# Altium PCB onboardingPCB_nathanlin.PcbDoc
Units mm, origin at the board's own origin, x right, y up, seen from the top; angles counter-clockwise.
Board outline 59.5 x 49.28 mm, 4 copper layers (Top Layer, Int1 (GND), Int2 (PWR), Bottom Layer), stack 1.369 mm thick; 24 components, 22 nets, 97 pads, 27 vias.
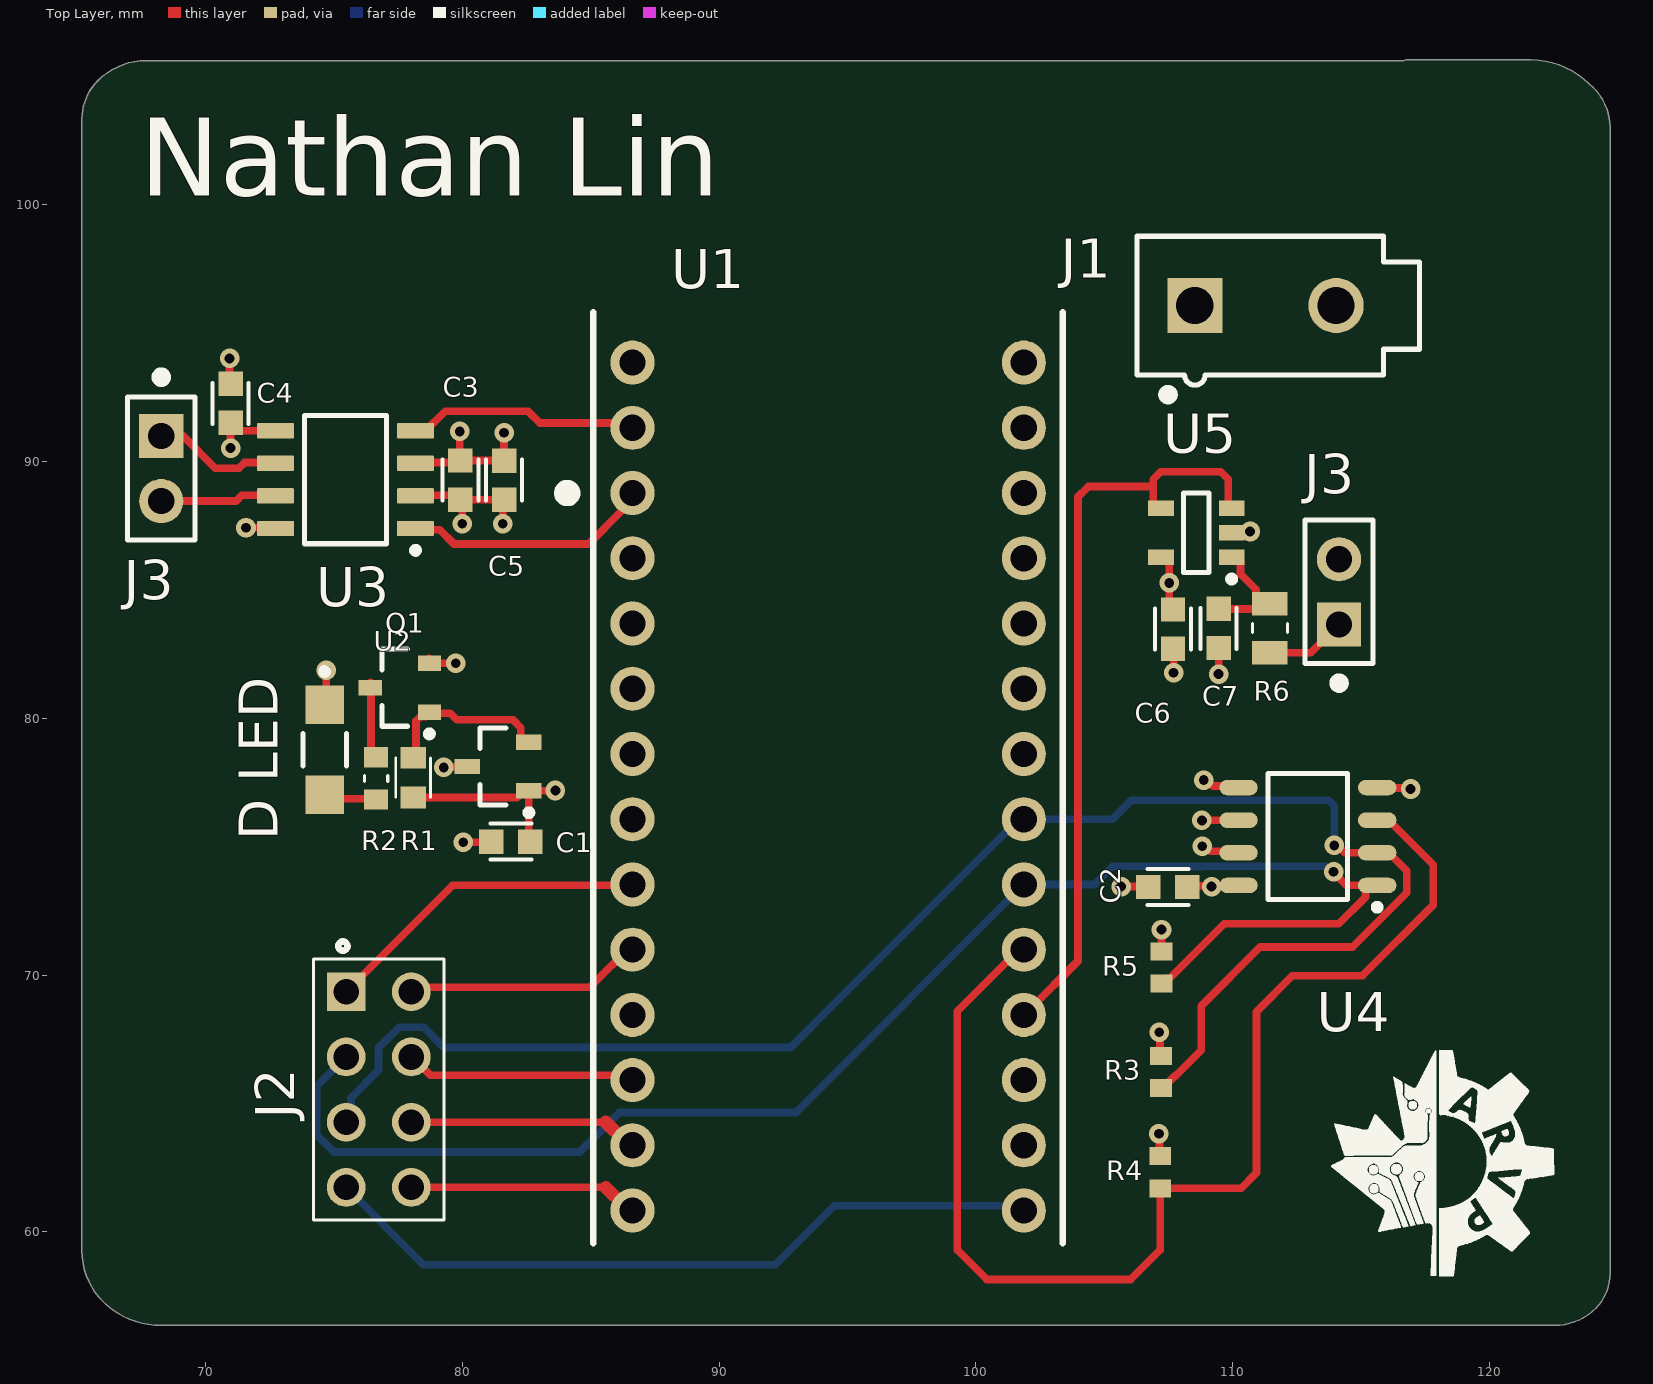
[diagram p0: Top Layer view]
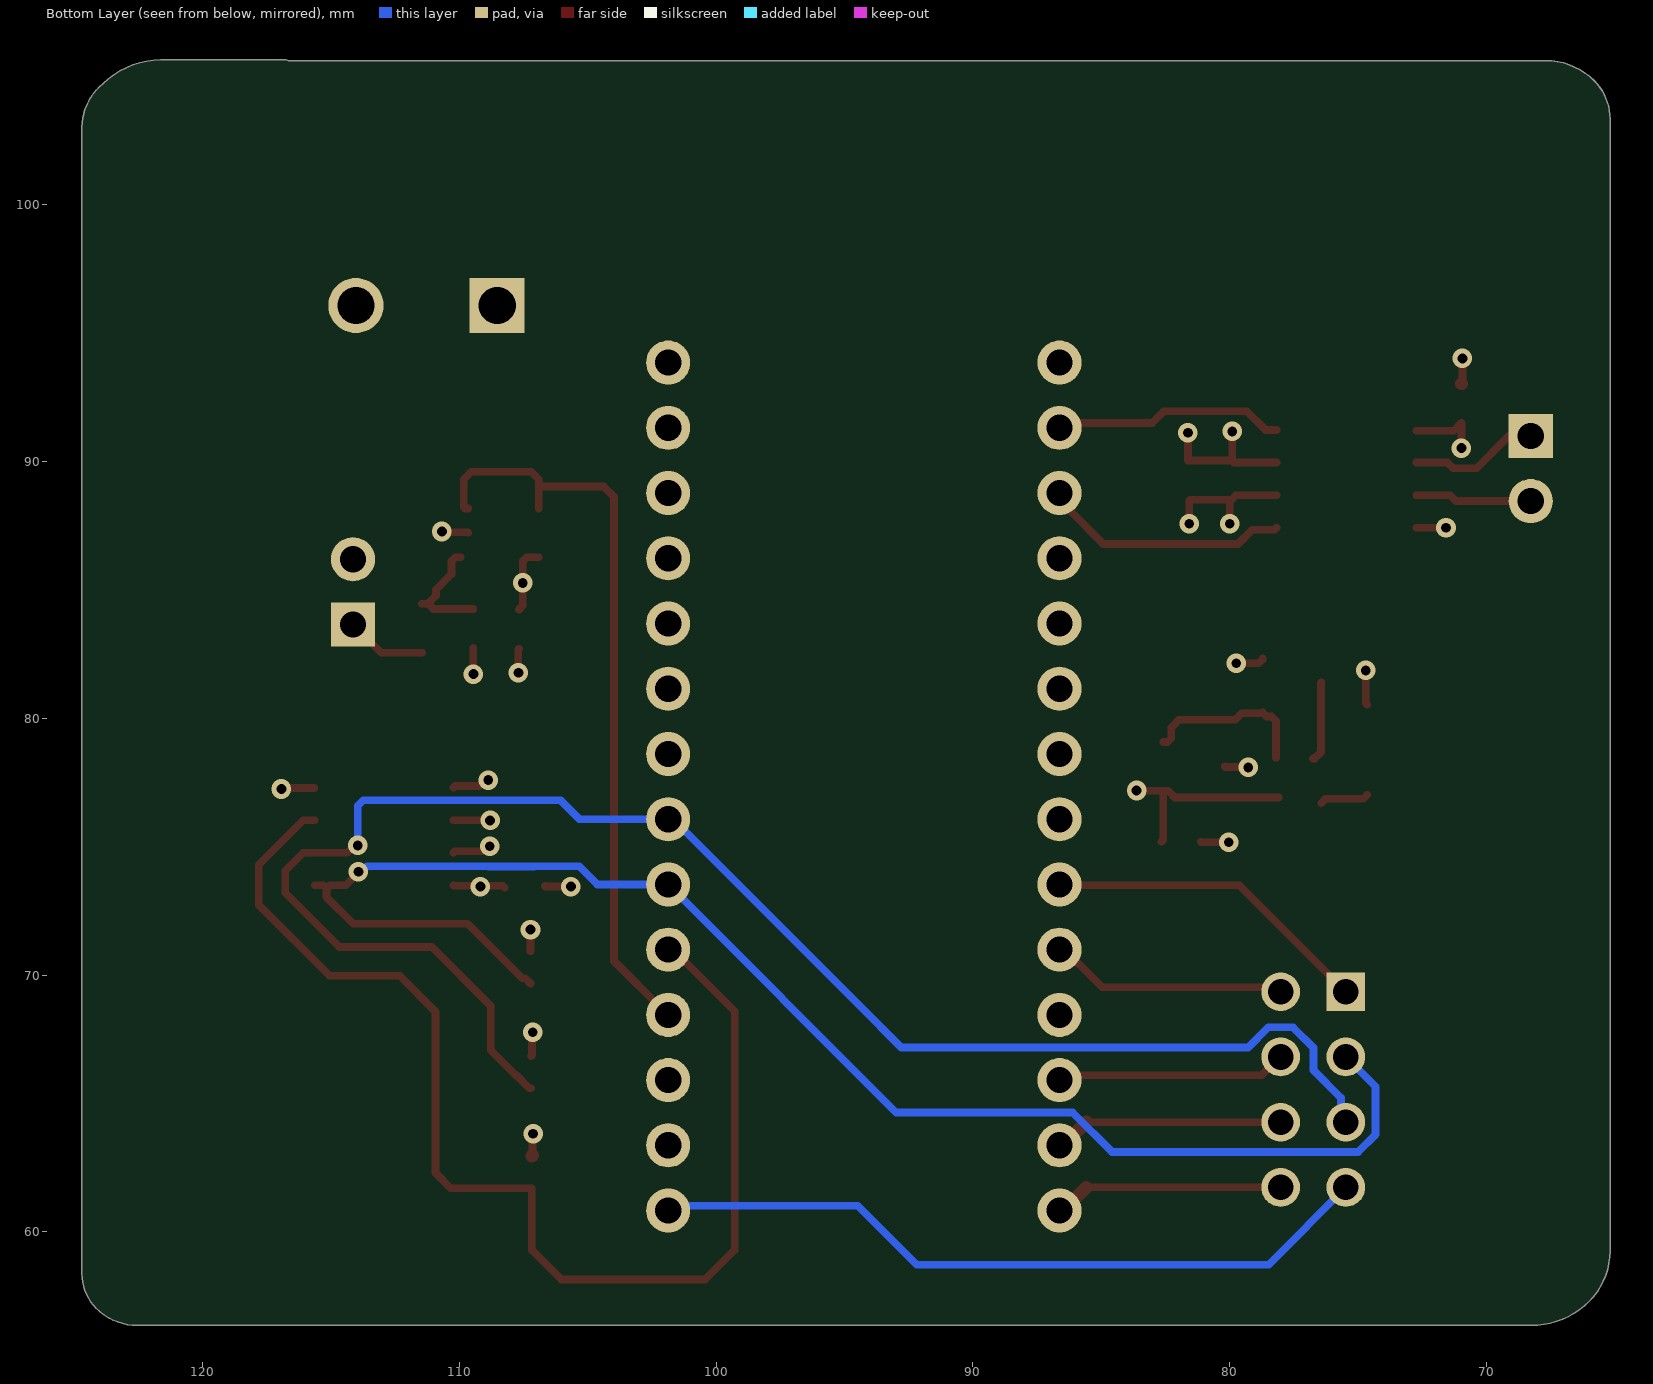
[diagram p1: Bottom Layer view, seen from below]
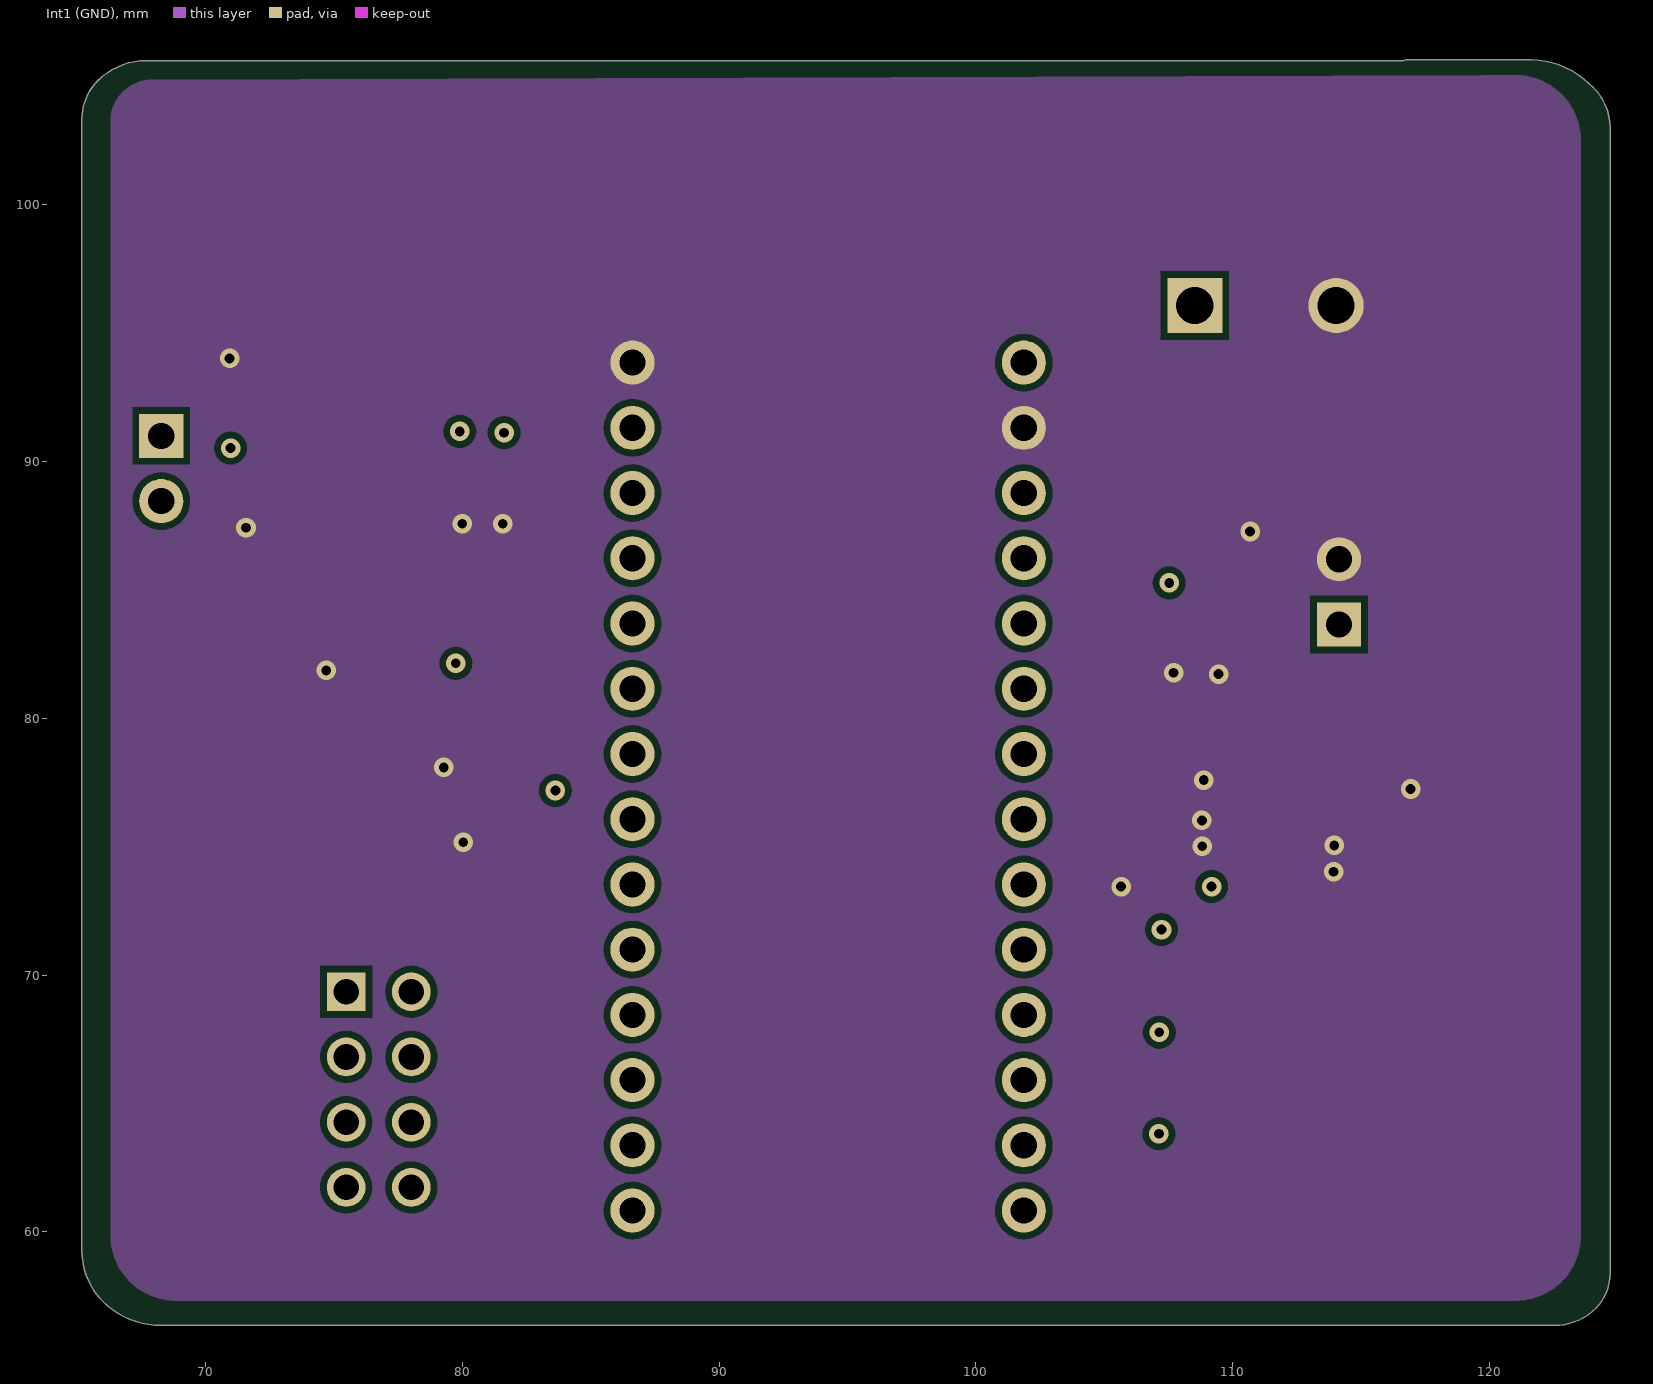
[diagram p2: Int1 (GND)]
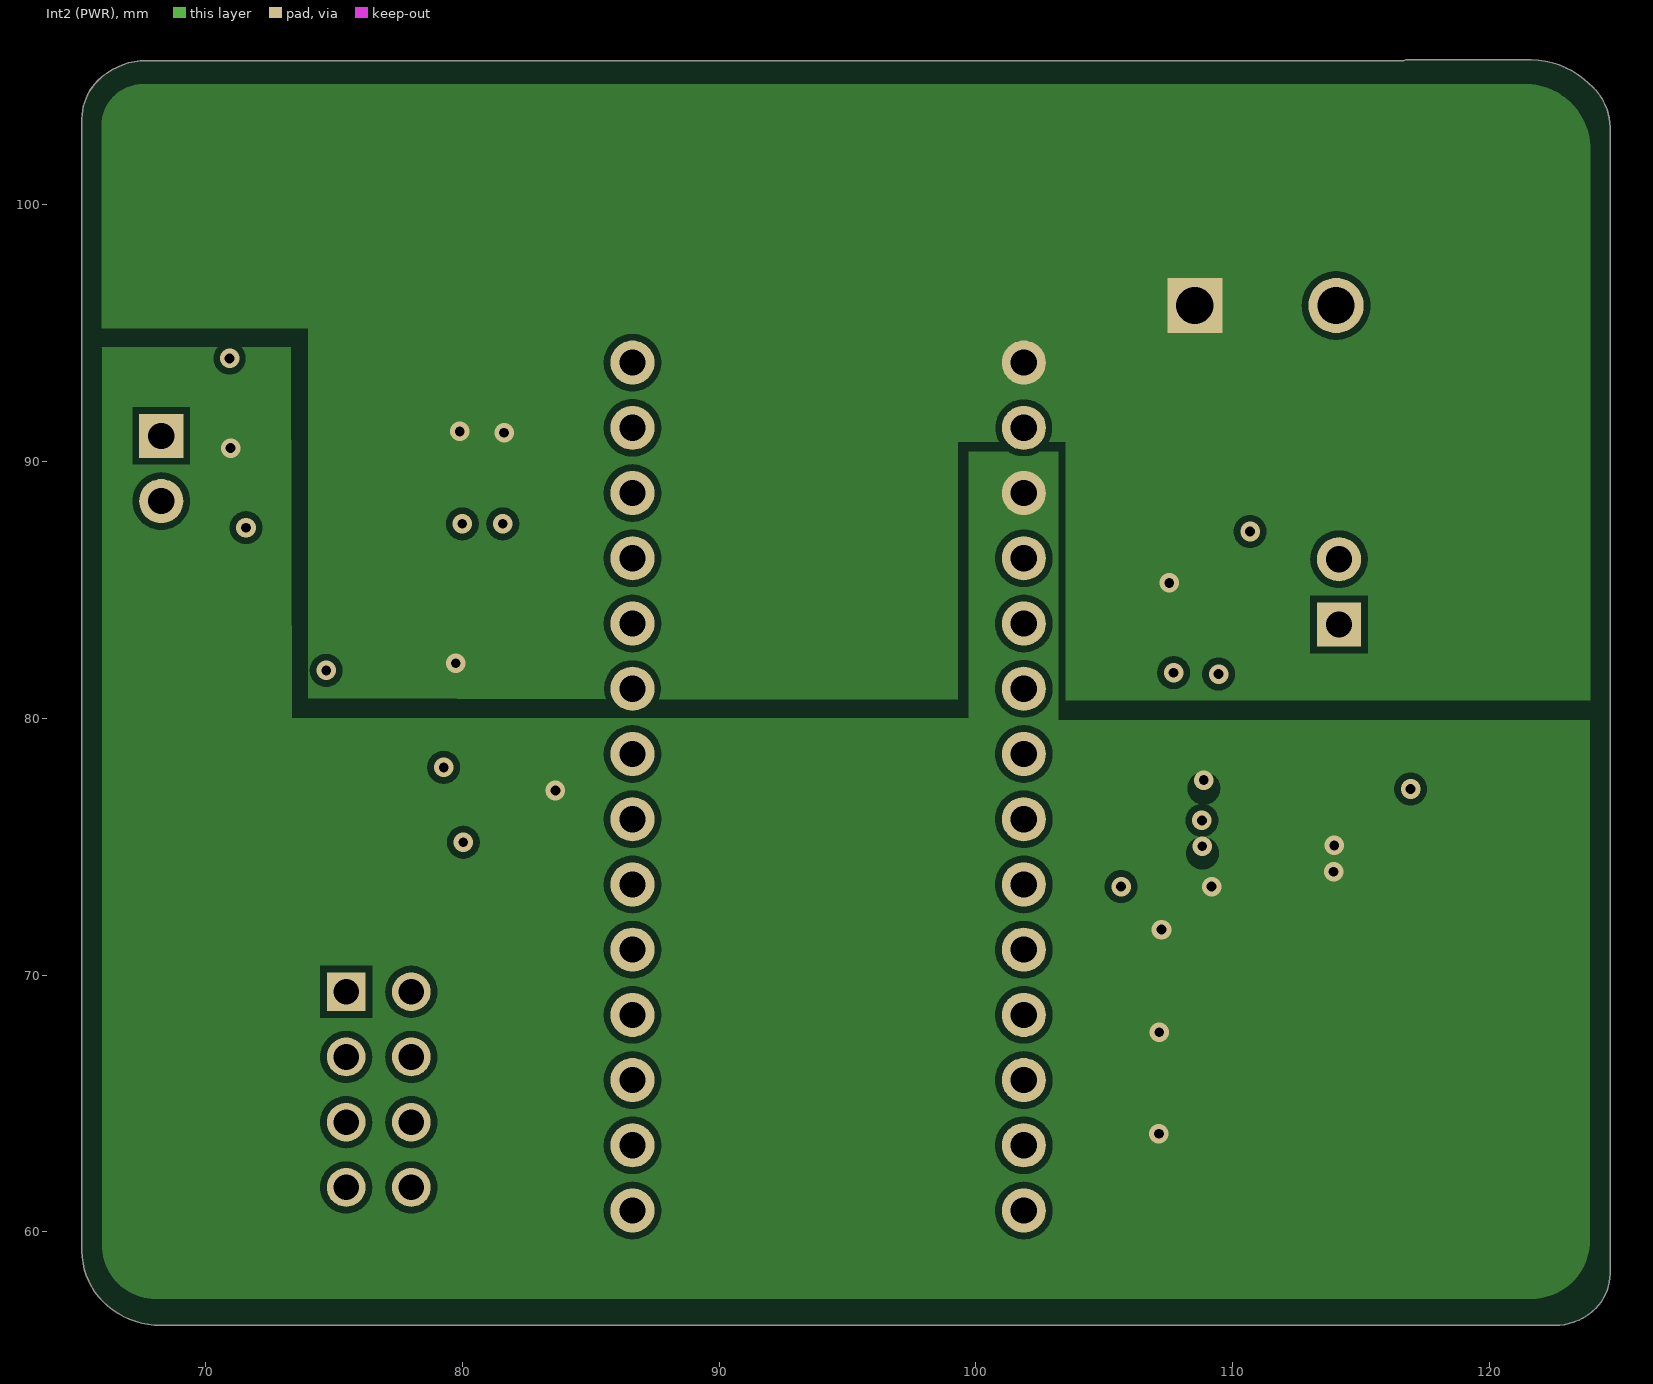
[diagram p3: Int2 (PWR)]

## Layer stack, top to bottom
Top Solder: solder mask 0.0254, SM-001, Dk 4
Top Layer: signal copper 0.035
Dielectric 1: prepreg 0.1295, PP-017, Dk 4.3
Dielectric 2: prepreg 0.1295, PP-017, Dk 4.3
Int1 (GND): signal copper 0.035
Dielectric 3: core 0.7112, Core-039, Dk 4.8
Int2 (PWR): signal copper 0.035
Dielectric 4: prepreg 0.1295, PP-017, Dk 4.3
Dielectric 5: prepreg 0.1295, PP-017, Dk 4.3
Bottom Layer: signal copper 0.035
Bottom Solder: solder mask 0.0254, SM-001, Dk 4

## Board outline
65.187,59.26 65.187,103.348 cw(c67.278,103.348) 65.8,104.826 cw(c67.7,102.925) 67.7,105.613 116.656,105.613 116.74,105.638 121.62,105.638 cw(c121.62,102.445) 123.873,104.708 cw(c122.52,103.008) 124.692,103.008 124.692,58.376 cw(c122.779,58.376) 124.132,57.023 cw(c122.528,58.626) 122.528,56.358 68.26,56.358 cw(c68.26,59.552) 66.002,57.294 cw(c67.968,59.26)

## Design rules (kind name [scope] priority, off if disabled: settings)
Clearance [All] p1: gap=0.254 ignorepadtopadclearanceinfootprint=FALSE
ComponentClearance [All] p1: gap=0 collisioncheckmode=3 verticalgap=0.254 showdistances=FALSE
PolygonConnect [All] p1: connectstyle=Direct reliefconductorwidth=0.254 reliefentries=4 polygonreliefangle="90 Angle" airgapwidth=0.254
RoutingVias [All] p1: holewidth=0.008 width=0.015 viastyle="Through Hole" minholewidth=0.006 minwidth=0.013 maxholewidth=0.011 maxwidth=0.023
SilkToSolderMaskClearance [IsText] p1: minsilkscreentomaskgap=0.254 clearancetoexposedcopper=TRUE
SolderMaskExpansion [All] p1: expansion=0 istentingtop=FALSE
SupplyNets "Schematic Supply Nets_2" [InNet('+3V3')] p1: voltage=0.000
SupplyNets "Schematic Supply Nets_1" [InNet('+5V')] p2: voltage=0.000
SupplyNets "Schematic Supply Nets" [InNet('GND')] p3: voltage=0.000
Width [All] p1: maxlimit=0.5 minlimit=0.005 preferedwidth=0.006
28 further rules are at their usual default settings.

## Components (designator, comment, footprint, x,y, rotation, side; value= is the part's Value field where it differs from the comment)
C1 "0.1uF" CAP_0603 81.888,75.2 r0 top value=100nF
C2 "0.1uF" CAP_0603 107.471,73.432 r0 top value=100nF
C3 "0.1uF" CAP_0603 79.925,89.278 r270 top value=100nF
C4 "0.1uF" CAP_0603 70.975,92.265 r270 top value=100nF
C5 "4.7uF" CAP_0603 81.625,89.275 r90 top
C6 "0.1uF" CAP_0603 107.675,83.475 r270 top value=100nF
C7 "4.7nF" CAP_0603 109.45,83.5 r270 top
"D LED" "LTST-C150GKT" LED_1206 74.64,78.779 r270 top (schematic designator "D LED1")
J1 "Molex-0039281023" 0039281023 111.275,96.075 r90 top
J2 "Harwin-M20-9980445" HARWIN_M20-9980445 78.015,69.355 r270 top
J3 "Harwin-M20-9990246" HARWIN_M20-9990246 68.275,89.73 r270 top
J3 "Harwin-M20-9990246" HARWIN_M20-9990246 114.14,84.928 r90 top (schematic designator JHarwinA1)
Q1 "BSS84AK,215" Nexperia_SOT-23-3 77.565,81.195 r180 top
R1 "1kOhm" RES_0603 78.084,77.694 r270 top value=1kR
R2 "2k7" RESC1608X55N 76.644,77.66 r90 top
R3 "5.6kOhm" RESC1608X55X30LL15T15 107.2,66.225 r90 top value=5.6kΩ
R4 "5.6kOhm" RESC1608X55X30LL15T15 107.175,62.325 r270 top value=5.6kΩ
R5 "5.6kOhm" RESC1608X55X30LL15T15 107.225,70.3 r270 top value=5.6kΩ
R6 "8.2kOhm" RESC2012X60N 111.449,83.51 r90 top
U1 "Teensy 4.0" TEENSY4.0 94.245,77.343 r0 top (schematic designator UTeen)
U2 "DRV5033FAEDBZRQ1" TI_SOT-23-3 81.39,78.127 r180 top
U3 "TCAN1042HVDR" TI_SOIC8 75.45,89.298 r180 top
U4 "TCN75AVOA713" Microchip_SOIC8 112.925,75.4 r180 top
U5 "LMV321IDBVR" SOT95P280X145-5N 108.58,87.225 r180 top

## Footprints (in the part's own frame and the unit in brackets; to place one, negate y for a bottom-side part, rotate by r counter-clockwise, add the part's x,y. Pads: shape width x height; smd on the part's side, far side on the other; paste and mask are expansions set on the pad)
0039281023 [mm] "THD, 2-Leads, Body 11x5.8mm"
  rect 2.15x2.15 hole 1.45: 1(0,2.75)
  round 2.15 hole 1.45: 2(0,-2.75)
  silkscreen extent -3.72,-6 2.7,5, body extent -3.1,-6 2.7,5, height 13.6
CAP_0603 [mm] "Chip Capacitor, 2-Leads, Body 1.60x0.80mm, IPC Medium Density"
  rect 0.95x0.95 smd mask+0.05: 1(-0.762,0) 2(0.762,0)
  silkscreen extent -0.8,-0.7 0.8,0.7, body extent -0.85,-0.45 0.85,0.45, height 0.9
HARWIN_M20-9980445 [mm]
  rect 1.508x1.508 hole 1: 1(0,-2.54)
  round 1.508 hole 1: 2(0,0) 3(2.54,-2.54) 4(2.54,0) 5(5.08,-2.54) 6(5.08,0) 7(7.62,-2.54) 8(7.62,0)
  silkscreen extent -1.96,-3.81 8.89,1.27, body extent -1.27,-3.81 8.89,1.27, height 8.64
HARWIN_M20-9990246 [mm]
  rect 1.72x1.72 hole 1.02 paste-2539.97 mask+0: 1(-1.27,0)
  round 1.72 hole 1.02 paste-2539.97 mask+0: 2(1.27,0)
  silkscreen extent -3.81,-1.32 2.79,1.32, body extent -2.89,-1.42 2.89,1.42, height 0.25
LED_1206 [mm]
  rect 1.5x1.5 smd: 1(-1.75,0) 2(1.75,0)
  silkscreen extent -3.17,-0.85 0.63,0.85, body extent -2.6,-0.95 2.6,0.95, height 0.25
Microchip_SOIC8 [mm] "SOIC, 8-Leads, Body 4.90x3.90mm, Pitch 1.27mm, IPC Medium Density"
  oval 1.5x0.6 smd: 1(-2.7,1.905) 2(-2.7,0.635) 3(-2.7,-0.635) 4(-2.7,-1.905) 5(2.7,-1.905) 6(2.7,-0.635) 7(2.7,0.635) 8(2.7,1.905)
  silkscreen extent -2.83,-2.45 1.55,2.88, body extent -3,-2.45 3,2.45, height 1.76
Nexperia_SOT-23-3 [mm] "SOT23, 3-Leads, Body 2.90x2.30mm, Pitch 0.95mm, IPC Medium Density"
  rect 0.9x0.6 smd: 1(-1.15,0.95) 2(-1.15,-0.95) 3(1.15,0)
  silkscreen extent -1.28,-1.5 0.7,1.92, body extent -1.24,-1.5 1.24,1.5, height 1.09
RES_0603 [mm] "Chip Resistor, 2-Leads, Body 1.60x0.80mm, IPC Medium Density"
  rect 0.85x1 smd mask+0.05: 1(-0.775,0) 2(0.775,0)
  silkscreen extent -0.76,-0.67 0.76,0.67, body extent -0.8,-0.4 0.8,0.4, height 0.53
RESC1608X55N [mm]
  rect 0.79x0.93 smd paste+0 mask+0.102: 1(-0.82,0) 2(0.82,0)
  silkscreen extent -0.11,-0.45 0.11,0.45, body extent -0.8,-0.4 0.8,0.4, height 0.55
RESC1608X55X30LL15T15 [mm] "Chip Resistor, 2-Leads, Body 1.60x0.80mm, IPC High Density"
  rect 0.7x0.85 smd: 1(-0.625,0) 2(0.625,0)
  body extent -0.87,-0.48 0.87,0.48, height 0.55
RESC2012X60N [mm]
  rect 0.92x1.38 smd paste+0 mask+0.102: 1(-0.955,0) 2(0.955,0)
  silkscreen extent -0.17,-0.68 0.17,0.68, body extent -1,-0.63 1,0.63, height 0.6
SOT95P280X145-5N [mm] "SOT23, 5-Leads, Body 2.90x2.80mm, Pitch 0.95mm, IPC Medium Density"
  rect 1x0.6 smd mask+0.07: 1(-1.375,0.95) 2(-1.375,0) 3(-1.375,-0.95) 4(1.375,-0.95) 5(1.375,0.95)
  silkscreen extent -1.5,-1.55 0.5,1.92, body extent -1.4,-1.45 1.4,1.45, height 1.45
TEENSY4.0 [mm]
  round 1.72 hole 1.02: 0(-7.62,13.97) 1(-7.62,11.43) 2(-7.62,8.89) 3(-7.62,6.35) 3.3V(7.62,11.43) 4(-7.62,3.81) 5(-7.62,1.27) 6(-7.62,-1.27) 7(-7.62,-3.81) 8(-7.62,-6.35) 9(-7.62,-8.89) 10(-7.62,-11.43) 11(-7.62,-13.97) 12(-7.62,-16.51) 13(7.62,-16.51) 14(7.62,-13.97) 15(7.62,-11.43) 16(7.62,-8.89) 17(7.62,-6.35) 18(7.62,-3.81) 19(7.62,-1.27) 20(7.62,1.27) 21(7.62,3.81) 22(7.62,6.35) 23(7.62,8.89) GND1(-7.62,16.51) GND2(7.62,13.97) VIN(7.62,16.51)
  silkscreen extent -10.41,-17.78 9.14,18.48, body extent -8.89,-18.03 8.89,18.54, height 15.43
TI_SOIC8 [mm] "SOIC, 8-Leads, Body 5x4mm, Pitch 1.27mm, IPC Medium Density"
  rrect17% 1.45x0.6 smd: 1(-2.725,1.905) 2(-2.725,0.635) 3(-2.725,-0.635) 4(-2.725,-1.905) 5(2.725,-1.905) 6(2.725,-0.635) 7(2.725,0.635) 8(2.725,1.905)
  silkscreen extent -2.85,-2.5 1.6,2.88, body extent -3,-2.45 3,2.45, height 1.63
TI_SOT-23-3 [mm] "SOT23, 3-Leads, Body 2.92x2.37mm, Pitch 0.95mm, IPC Medium Density"
  rect 1x0.6 smd: 1(-1.2,0.95) 2(-1.2,-0.95) 3(1.2,0)
  silkscreen extent -1.33,-1.5 0.7,1.92, body extent -1.18,-1.46 1.18,1.46, height 1.13

## Part data
C1 C2 C3 C4 C6: library part CMP-097-000004-12, "CAP CER 0.1UF 50V X7R 0603", Capacitor Type=Ceramic, Case/Package=0603, JLCPCB Part No.=C14663, Max Operating Temperature=125°C, Min Operating Temperature=-55°C, Package Shape=Rectangular, Package Style=SMTMeter, Rated DC Voltage (URdc)=50V, Temperature Characteristics Code=X7R, Tolerance  (fill in as +-)=10%, Dielectric Material=Ceramic, Height=0.8mm, JESD-609 Code=e3, Length=1.6mm, Mounting Technology="Surface Mount", Multilayer=Yes, Packaging="Tape and Reel", Pins=2, Reach SVHC Compliant=Yes, RoHS Compliant=Yes, Terminal Finish=Nickel, Termination=Wraparound, Tolerance (fill in as +-)=10%, Width=0.8mm
C5: library part CMP-097-000005-7, "CAP CER 4.7UF 16V X5R 0603", Capacitor Type=Ceramic, Case/Package=0603, JLCPCB Part No.=C19666, Max Operating Temperature=85°C, Min Operating Temperature=-55°C, Package Shape=Rectangular, Package Style=SMTMeter, Rated DC Voltage (URdc)=16V, Temperature Characteristics Code=X5R, Tolerance  (fill in as +-)=10%, Dielectric Material=Ceramic, Height=0.9mm, JESD-609 Code=e3, Length=1.6mm, Mounting Technology="Surface Mount", Multilayer=Yes, Packaging="Tape and Reel", Pins=2, Reach SVHC Compliant=Yes, RoHS Compliant=Yes, Terminal Finish=Nickel, Termination=Wraparound, Tolerance (fill in as +-)=10%, Width=0.8mm
C7: library part CMP-00057-1, "4700 pF ±10% 50V Ceramic Capacitor X7R 0603 (1608 Metric)", Capacitor Type=Ceramic, Case/Package=0603, JLCPCB Part No.=C1621, Max Operating Temperature=125°C, Min Operating Temperature=-55°C, Package Shape=Rectangular, Package Style=SMTMeter, Rated DC Voltage (URdc)=50V, Temperature Characteristics Code=X7R, Tolerance  (fill in as +-)=10%, Dielectric Material=Ceramic, Height=0.9mm, JESD-609 Code=e3, Length=1.6mm, Mounting Technology="Surface Mount", Multilayer=Yes, Packaging="Tape and Reel", Pins=2, Reach SVHC Compliant=Yes, RoHS Compliant=Yes, Terminal Finish=Nickel, Termination=Wraparound, Tolerance (fill in as +-)=10%, Width=0.8mm
"D LED": library part CMP-00008-10, "LED GREEN CLEAR 1206 SMD", Case Code (Imperial)=1206, Case Code (Metric)=3216, Color=Green, Forward Current=30mA, Forward Voltage=2.1V, JLCPCB Part No.=C125084, Lens Color=Colorless, Max Operating Temperature=85°C, Max Power Dissipation=100mW, Min Operating Temperature=-55°C, Package Quantity=3000, Reverse Voltage=5V, Test Current=10mA, Case/Package=1206, Depth=1.6mm, Dominant Wavelength=569nm, Height=1.1mm, Illumination Color=Green, Lead Free="Lead Free", Length=3.2mm, Lens Size=1.6mm, Lens Style=Flat,Diffused,Colorless,Rectangular,Clear, Lens Transparency=Clear, Luminous Intensity=6mcd, Mounting Technology="Surface Mount", Number of Elements=1, Number of LEDs=1, Packaging="Tape and Reel", Pins=2, Power Dissipation=100mW, Power Rating=100mW, Radiation Hardening=No, RoHS Compliant=Yes, Series=-, Viewing Angle=130°, Wavelength=565nm, Width=1.6mm
J1: library part CMP-00006-5, "Connector Header Through Hole 2 position", Color=Natural,Clear, Contact Resistance=10mR, Current Rating=9A, Flammability Rating="UL94 V-2", Housing Color=Natural, Insulation Resistance=1GR, JLCPCB Part No.=C9900017326, Max Current Rating=15A, Max Operating Temperature=105°C, Max Voltage Rating (AC)=600V, Min Operating Temperature=-40°C, Package Quantity=1200, Working Voltage=250V, Approvals=UL,CSA,TUV, Connector Type=Power,Rectangular, Contact Gender=Male, Contact Material=Brass, Contact Plating=Tin,Copper, Contact Type="Male Pin", Depth=11mm, Fastening Type=Ramp, Gender=Male, Glow Wire Compliant=Non-compliant, Halogen Free="Low Halogen", Height=12mm, Housing Material=Nylon, Lead Free="Lead Free", Lead Pitch=4.2mm, Length=6.2mm, Max Voltage Rating (DC)=600V, Mount="Through Hole,Board", Number of Circuits=2, Number of Contacts=2, Number of Poles=2, Number of Ports=1, Number of Positions=2, Number of Rows=2, Orientation=Straight, Packaging=Tray, Pitch=4.2mm, Radiation Hardening=No, Reach SVHC Compliant=Unknown, RoHS Compliant=Yes, Row Spacing=0.165inch, Series="Mini-Fit® Jr™ 5566", Termination=Solder, Voltage Rating=600V, Voltage Rating (AC)=600V, Voltage Rating (DC)=600V
J2: library part CMP-025-000000-12, "Connector Header Through Hole 8 position 0.100\" (2.54mm)", Contact Resistance=25mR, Dielectric Withstanding Voltage (AC)=750V, Flammability Rating="UL94 V-0", Insulation Color=Black, Insulation Resistance=1GR, JLCPCB Part No.=C6897587, Max Operating Temperature=105°C, Min Operating Temperature=-40°C, Package=None, Rated Current (Signal)=3A, Availability=Unavailable, Body Breadth=0.2inch, Body Depth=0.1inch, Body Length=0.4inch, Body/Shell Style=RECEPTACLE, Component Type=Standard, Connector Type="BOARD CONNECTOR", Contact Finish - Mating=GOLD, Contact Finish - Termination="Gold (Au) - with Nickel (Ni) barrier", Contact Gender=Male, Contact Pattern=RECTANGULAR, Contact Style="SQ PIN-SKT", Design Item ID=M20-9980445, DIN Conformance=No, Durability=300Cycles, Filter Feature=No, IEC Conformance=No, Insulation Material=Nylon, JESD-609 Code=e4, Mating Contact Pitch=0.1inch, MF="Harwin Inc.", MIL Conformance=No, Mixed Contacts=No, Mounting Style=STRAIGHT, Mounting Technology=Board, MP=M20-9980445, Number Of Connectors=1, Number of Contacts=8, Number Of PCB Rows=1, Number of Rows Loaded=1, Option="General Purpose", PCB Contact Pattern=RECTANGULAR, Pin Count=8, Price=None, Reach SVHC Compliant=Yes, Reference Standard=UL, Reliability=COMMERCIAL, RoHS Compliant=Yes, SnapEDA_Link=https://www.snapeda.com/parts/M20-9980445/Harwin%20Inc./view-part/282788/?ref=snap, Source=SnapEDAsch.SchLib, Terminal Length=0.118inch, Terminal Pitch=2.54mm, Termination=Solder
J3 J3: library part CMP-00000-10, "Connector Header Through Hole 2 position 0.100\" (2.54mm)", Case/Package=SIL, Color=Black, Contact Resistance=30mR, Current Rating=3A, Insulation Resistance=10GR, JLCPCB Part No.=C3332353, Max Operating Temperature=105°C, Min Operating Temperature=-40°C, Package Quantity=1000, Voltage Rating (AC)=750V, Contact Material=Bronze,Brass, Contact Mating Length=0.24inch, Contact Plating=Tin, Contact Type="Male Pin", Depth=2.54mm, Gender=Male, Housing Color=Black, Housing Material=Nylon, Length=5.08mm, Max Current Rating=3A, Mount="Through Hole", Number of Contacts=2, Number of Positions=2, Number of Rows=1, Orientation=Straight, Packaging=Bulk, Pitch=2.54mm, Radiation Hardening=No, Reach SVHC Compliant=No, Series=M20, Termination=Solder
Q1: library part CMP-00009-12, "P-Channel 50 V 180mA (Ta) 350mW (Ta), 1.14W (Tc) Surface Mount TO-236AB", Drain Current-Max (ID)=180mA, Drain-source On Resistance-Max=8.5R, DS Breakdown Voltage-Min=50V, JLCPCB Part No.=C127273, Operating Mode="ENHANCEMENT MODE", Package Body Material=Plastic, Package Shape=Rectangular, Package Style="SMALL OUTLINEMeter", Peak Reflow Temperature (Cel)=260°C, Time @ Peak Reflow Temperature-Max (s)=30s, FET Technology="METAL-OXIDE SEMICONDUCTOR", JEDEC-95 Code=TO-236AB, JESD-30 Code=R-PDSO-G3, JESD-609 Code=e3, Moisture Sensitivity Level=1, Number of Elements=1, Pins=3, Polarity/Channel Type=P-CHANNEL, Reach SVHC Compliant=Yes, Reference Standard=AEC-Q101, RoHS Compliant=Yes, Surface Mount=Yes, Terminal Finish=Tin, Terminal Form="Gull Wing", Terminal Position=DUAL, Transistor Application=SWITCHING, Transistor Element Material=SILICON
R1: library part CMP-019-000000-16, "1 kOhms ±1% 0.1W, 1/10W Chip Resistor 0603 (1608 Metric) Moisture Resistant Thick Film", Case/Package=0603, JLCPCB Part No.=C22548, Max Operating Temperature=155°C, Min Operating Temperature=-55°C, Package="2012 Rohm Semiconductor", Package Height=0.45mm, Package Length=1.6mm, Package Shape=Rectangular, Package Style=SMTMeter, Package Width=0.8mm, Power=100mW, Rated Temperature=70°C, Resistor Type="FIXED RESISTOR", Temperature Coefficient=100ppm/°C, Tolerance=1%, Working Voltage=75V, Additional Feature="LASER TRIMMABLE", Availability="In Stock", Check_prices=https://www.snapeda.com/parts/RC0805FR-071KL/Yageo/view-part/?ref=eda, Component Type=Standard, Construction=Chip, Design Item ID=RC0805FR-071KL, JESD-609 Code=e3, MF=Yageo, Mounting Technology="Surface Mount", MP=RC0805FR-071KL, Packaging="Tape and Reel", Pin Count=2, Pins=2, Price=None, Purchase-URL=https://pricing.snapeda.com/search/part/RC0805FR-071KL/?ref=eda, Reach SVHC Compliant=Yes, RoHS Compliant=Yes, SnapEDA_Link=https://www.snapeda.com/parts/RC0805FR-071KL/Yageo/view-part/?ref=snap, Source=RC0805FR-071KL.SchLib, Technology="METAL GLAZE/THICK FILM", Terminal Finish=Nickel, Termination=Wraparound
R2: library part CMP-234-000000-3, "2.7 kOhms Â±5% 0.1W, 1/10W Chip Resistor 0603 (1608 Metric) Moisture Resistant Thick Film", Package="1608 Yageo", Check_prices=https://www.snapeda.com/parts/RC0603JR-072K7L/Yageo/view-part/?ref=eda, Component Type=Standard, Design Item ID=RC0603JR-072K7L, MF=Yageo, MP=RC0603JR-072K7L, Pin Count=2, SnapEDA_Link=https://www.snapeda.com/parts/RC0603JR-072K7L/Yageo/view-part/?ref=snap, Source=RC0603JR-072K7L.SchLib
R3 R4 R5: library part CMP-234-000004-1, "Res Thick Film 0603 5.6K Ohm 5% 1/10W ±200ppm/°C Molded SMD Punched Carrier T/R"
R6: library part CMP-234-000001-2, "8.2 kOhms Â±5% 0.125W, 1/8W Chip Resistor 0805 (2012 Metric) Moisture Resistant Thick Film", Package="2012 Yageo", Check_prices=https://www.snapeda.com/parts/RC0805JR-078K2L/Yageo/view-part/?ref=eda, Component Type=Standard, Design Item ID=RC0805JR-078K2L, MF=Yageo, MP=RC0805JR-078K2L, Pin Count=2, SnapEDA_Link=https://www.snapeda.com/parts/RC0805JR-078K2L/Yageo/view-part/?ref=snap, Source=RC0805JR-078K2L.SchLib
U1: library part CMP-009-000000-26, "RT1062 Teensy 4.0 i.MX ARM® Cortex®-M7 MPU Embedded Evaluation Board"
U2: library part CMP-00001-8, "Digital Switch Omnipolar Switch Open Drain Hall Effect SOT-23-3", JLCPCB Part No.=C2655029, Max Operating Temperature=125°C, Max Output current=30A, Max Supply Voltage=38V, Min Operating Temperature=-40°C, Min Supply Voltage=2.7V, Operating Current-Max=3.6mA, Package Shape/Style=Rectangular, Body Breadth=1.3inch, Body Height=1.005mm, Body Length or Diameter=2.92mm, Housing Material=Plastic, Hysteresis=1.5mT, JESD-609 Code=e3, Magnetic Field Range-Max=6mT, Magnetic Field Range-Min=-0.5mT, Mounting Technology="Surface Mount", Output Interface Type=2-Wire, Output Range=0-38V, Output Type="DIGITAL VOLTAGE", Reach SVHC Compliant=Yes, RoHS Compliant=Yes, Sensor Type="MAGNETIC FIELD SENSOR,HALL EFFECT", Terminal Finish=Tin, Termination=Solder
U3: library part CMP-00002-18, "1/1 Transceiver CANbus 8-SOIC", Case/Package=SOP, JLCPCB Part No.=C127869, Max Operating Temperature=125°C, Max Supply Voltage=5.5V, Min Operating Temperature=-55°C, Min Supply Voltage=4.5V, Nominal Supply Voltage=5V, Data Rate=2Mbps, Lead Free="Lead Free", Mount="Surface Mount", Number of Pins=8, Number of Receive Buffers=1, Number of Transmit Buffers=1, Packaging="Cut Tape", Pins=8, Reach SVHC Compliant=No, Receiver Hysteresis=120mV, RoHS Compliant=Yes, Series=-
U4: library part CMP-00017-3, "Temperature Sensor Digital, Local -40°C ~ 125°C 11 b 8-SOIC", JLCPCB Part No.=C144313, Max Operating Temperature=125°C, Max Supply Voltage=5.5V, Min Operating Temperature=-40°C, Min Supply Voltage=2.7V, Operating Current-Max=200uA, Package Body Material=Plastic, Package Equivalence Code=SOP8,.25, Package Shape/Style=Rectangular, Power Supplies=3/5V, Accuracy-Max (Cel)=2°C, Body Breadth=3.91inch, Body Height=1.55mm, Body Length or Diameter=4.9mm, Housing Material=Plastic, JESD-609 Code=e3, Mounting Technology="Surface Mount", Number of Bits=12, Output Interface Type=I2C, Pins=8, Reach SVHC Compliant=Yes, RoHS Compliant=Yes, Sensor Type="TEMPERATURE SENSOR,SWITCH/DIGITAL OUTPUT,SERIAL", Terminal Finish=Tin, Termination=Solder
U5: library part CMP-095-000002-10, "General Purpose Amplifier 1 Circuit Rail-to-Rail SOT-23-5", Case/Package=LSSOP, JLCPCB Part No.=C7972, Max Operating Temperature=125°C, Min Operating Temperature=-40°C, Packaging="Tape and Reel", RoHS Compliant=Yes

## Via types
v1: diameter 0.762, hole 0.381, Top Layer to Bottom Layer, 27 vias

## Nets (pads, with @x,y where several pads share a name; then routed paths per layer and width w, separated by ;. In a path a pad name is that pad's centre, name@x,y a point inside that pad or via, vN(x,y) a via of type N, cw(c..) or ccw(c..) an arc to the next point about the centre after c; other vN are vias at no path point)
+3V3: C1.2 C2.2 C4.2 R1.2 R3.2 R4.1 R5.1 U1.3.3V U2.1 U3.5 U4.8 | length 15.2
  Top Layer w0.3: v1(70.975,90.525) C4.2 71.276,91.203 U3.5 ; R1.2 82.132,76.919 82.39,77.177 U2.1 ; C1.2 82.59,75.26 U2.1 ; v1(83.622,77.192) 83.615,77.184 82.597,77.184 U2.1 ; v1(107.14,67.775) 107.17,67.745 107.17,66.88 R3.2 ; R4.1@107.15,62.975 v1@107.15,63.8 ; R5.1 v1(107.225,71.775) ; C2.2@108.233,73.408 108.301,73.476 110.206,73.476 U4.8
  Top Layer w0.5: v1(107.125,63.825) v1@107.15,63.8 ; R4.1@107.15,62.975 R4.1
  other v1: 109.175,73.45
+5V: C3.1 C5.2 C6.1 J1.1 Q1.2 U1.VIN U3.3 U5.5 | length 9.5
  Top Layer w0.3: U3.3@78.175,89.96 79.845,89.96 C3.1 ; Q1.2@78.715,82.344 78.715,82.295 78.868,82.142 78.94,82.142 78.942,82.143 79.745,82.143 v1(79.747,82.142) ; v1(79.9,91.175) 79.9,90.065 C3.1 ; v1(81.625,91.125) 81.625,90.042 81.622,90.04 C3.1 ; U5.5@106.9,86.275 107.375,86.275 107.525,86.125 107.525,84.387 C6.1
  other v1: 107.525,85.275
ALERT: R4.2 U1.17 U4.3 | length 47.6
  Top Layer w0.3: U1.17@101.865,71.185 99.275,68.595 99.275,59.3 100.425,58.15 106.025,58.15 107.175,59.3 R4.2 110.325,61.7 110.925,62.3 110.925,68.575 112.325,69.975 115.05,69.975 117.808,72.733 117.808,74.302 116.075,76.035 U4.3
ANALOG: U1.16 U5.3 U5.4 | length 29.6
  Top Layer w0.3: U1.16@101.865,68.645 102.07,68.645 103.975,70.55 103.975,88.625 104.375,89.025 106.9,89.025 ; U5.4@106.9,88.175 106.9,89.025 ; U5.3@109.65,88.175 109.775,88.175 109.825,88.225 109.825,89.307 109.532,89.6 107.193,89.6 106.9,89.307 106.9,89.025
"CAN H": J3.2@68.275,88.46 U3.7 | length 4.2
  Top Layer w0.3: J3.2@68.6,88.46 71.185,88.46 71.415,88.69 U3.7@72.725,88.69
"CAN L": J3.1@68.275,91 U3.6 | length 5.1
  Top Layer w0.3: J3.1@68.275,91 69.12,91 70.38,89.74 71.3,89.74 71.52,89.96 U3.6@72.725,89.96
"CS T": J2.4 U1.10 | length 8.9
  Top Layer w0.3: J2.4 78.049,66.815 78.759,66.105 U1.10@86.625,66.105
GND: "D LED.1" C1.1 C2.1 C3.2 C4.1 C5.1 C6.2 C7.2 J1.2 J3.2@114.14,86.198 U1.GND1 U1.GND2 U2.3 U3.2 U3.8 U4.4 U4.5 U4.6 U4.7 U5.2 | length 20.6
  Top Layer w0.3: v1(70.935,94.015) 70.935,93.067 C4.1@70.972,93.03 ; v1(71.575,87.425) 71.577,87.422 72.723,87.422 U3.8@72.725,87.42 ; 74.64,80.529 74.697,80.586 v1(74.697,81.867) ; U3.2@78.175,88.69 79.751,88.69 C3.2 ; v1(79.272,78.092) 79.29,78.109 80.172,78.109 U2.3 ; v1(80,87.575) 80,88.441 C3.2 ; v1(80.038,75.175) 81.101,75.175 C1.1 ; v1(81.575,87.575) 81.575,88.463 81.522,88.516 C3.2 ; v1(105.65,73.45) 106.652,73.45 C2.1@106.672,73.469 ; C6.2 107.698,82.69 v1(107.698,81.779) ; v1(108.8,76.025) 108.805,76.03 110.22,76.03 U4.6 ; v1(108.812,75.019) 108.937,75.019 109.134,74.822 110.168,74.822 U4.7 ; v1(108.875,77.595) 109,77.595 109.233,77.362 110.168,77.362 U4.5 ; v1(109.45,81.725) C7.2 ; U5.2@109.65,87.225 109.675,87.25 110.65,87.25 v1(110.675,87.275) ; U4.4@115.644,77.286 v1@116.889,77.286
  Top Layer w0.5: C4.1@70.972,93.03 C4.1 ; v1@116.889,77.286 v1(116.925,77.25)
"MISO T": J2.8 U1.12 | length 8.9
  Top Layer w0.3: J2.8 85.585,61.735
  Top Layer w0.5: 85.585,61.735 86.295,61.025 U1.12@86.625,61.025
"MOSI T": J2.6 U1.11 | length 8.9
  Top Layer w0.3: J2.6 85.585,64.275
  Top Layer w0.5: 85.585,64.275 86.295,63.565 U1.11@86.625,63.565
NetC7_1: C7.1 R6.2 U5.1 | length 4.5
  Top Layer w0.3: C7.1 111.016,84.262 R6.2@111.219,84.465 ; U5.1 110.155,86.275 110.305,86.125 110.305,85.608 110.909,85.005 110.909,84.775 R6.2@111.219,84.465 ; R6.2 R6.2@111.219,84.465
"NetD LED1_2": "D LED.2" R2.1 | length 1.9
  Top Layer w0.3: 74.64,77.029 74.802,76.867 76.268,76.867 R2.1@76.438,76.696
NetJHarwinA1_1: J3.1@114.14,83.658 R6.1 | length 3.5
  Top Layer w0.3: R6.1 113.037,82.555 J3.1@114.375,83.893
NetQ1_1: Q1.1 R1.1 U2.2 | length 6.7
  Top Layer w0.3: R1.1@78.197,78.467 78.197,79.9 78.373,80.075 78.565,80.075 Q1.1@78.715,80.225 ; Q1.1@78.715,80.196 79.527,80.196 79.781,79.942 81.972,79.942 82.274,79.64 82.274,79.227 82.424,79.077 U2.2
NetQ1_3: Q1.3 R2.2 | length 3.1
  Top Layer w0.3: Q1.3@76.438,81.394 76.442,81.389 76.442,78.685 76.687,78.44 R2.2@76.757,78.44
"RX T": J2.1 U1.7 | length 13
  Top Layer w0.3: J2.1 79.62,73.5 86.4,73.5 U1.7@86.625,73.725
"RX TCAN": U1.0 U3.4 | length 8.9
  Top Layer w0.3: U3.4@78.175,91.23 78.6,91.23 79.33,91.96 82.558,91.96 83.013,91.505 U1.0@86.625,91.505
SCK: J2.7 U1.13 | length 28.6
  Bottom Layer w0.3: J2.7 78.485,58.725 92.179,58.725 94.479,61.025 U1.13@101.865,61.025
SCL: J2.5 R3.1 U1.19 U4.2 | length 64.7
  Top Layer w0.3: R3.1 107.275,65.6 107.771,66.096 107.792,66.096 108.775,67.079 108.775,68.8 111.075,71.1 114.676,71.1 116.779,73.203 116.779,74.061 116.075,74.765 114.36,74.765 114.075,75.05 v1(113.95,75.05)
  Bottom Layer w0.3: J2.5 75.668,64.468 75.668,65.229 76.733,66.294 76.733,67.171 77.535,67.973 78.495,67.973 79.284,67.184 92.784,67.184 94.444,68.844 U1.19@101.769,76.169 ; U1.19 105.319,76.073 106.056,76.81 113.739,76.81 113.95,76.599 v1(113.95,75.05)
SDA: J2.3 R5.2 U1.18 U4.1 | length 59.6
  Top Layer w0.3: R5.2 107.425,69.875 107.55,69.875 109.676,72.001 114.131,72.001 115.17,73.04 115.17,73.356 115.036,73.49 115.036,73.495 114.425,73.495 113.925,73.995 v1(113.925,74.025) ; U4.1@115.308,73.495 U4.1
  Bottom Layer w0.3: J2.3 74.317,65.657 74.317,63.795 74.995,63.117 84.582,63.117 86.113,64.649 92.981,64.649 U1.18 104.623,73.533 105.325,74.235 107.086,74.235 107.087,74.234 108.849,74.234 108.85,74.235 113.59,74.235 113.8,74.025 v1(113.925,74.025)
"TX T": J2.2 U1.8 | length 9.4
  Top Layer w0.3: J2.2 78.185,69.525 84.965,69.525 U1.8@86.625,71.185
"TX TCAN": U1.1 U3.1 | length 9.9
  Top Layer w0.3: U3.1@78.175,87.42 78.256,87.339 79.126,87.339 79.675,86.79 84.915,86.79 86.231,88.106 86.231,88.187 86.625,88.581 U1.1@86.625,88.965
pads on no net: U1.2 U1.3 U1.4 U1.5 U1.6 U1.9 U1.14 U1.15 U1.20 U1.21 U1.22 U1.23

## Polygon pours and split planes (outlines as drawn)
+3V3 on Int2 (PWR) "+3V3_L03_P002" (solid, pour order 2): 65.95,94.45 cw(c65.95,94.425) 65.975,94.425 65.975,59.475 ccw(c68.05,59.475) 68.05,57.4 121.65,57.4 ccw(c121.65,59.65) 123.9,59.65 123.9,79.925 103.2,79.95 103.2,90.375 99.725,90.375 99.725,80 73.35,80 73.325,94.45 66,94.45
+5V on Int2 (PWR) "+5V_L03_P001" (solid, pour order 1): 121.385,104.7 cw(c121.385,102.16) 123.925,102.16 123.925,80.7 103.5,80.7 103.5,90.775 99.3,90.775 99.3,80.725 74,80.775 74,95.2 65.95,95.2 65.95,103.025 65.95,103.05 cw(c67.575,103.075) 67.55,104.7 68.25,104.7 67.55,104.7 68.25,104.7
GND on Int1 (GND) "GND_L02_P000" (solid, pour order 0): 67.925,104.875 ccw(c67.925,103.25) 66.3,103.25 66.3,59.865 ccw(c68.84,59.865) 68.84,57.325 121.025,57.325 ccw(c121.025,59.85) 123.55,59.85 123.55,102.51 ccw(c121.01,102.51) 121.01,105.05 119.675,105.05

## Other copper
Top Layer:

## Silkscreen, mask and mechanical layers (free items; w line width, h text height)
Top Overlay:
  drawing of 11 lines, arcs and shapes, not listed
  text "Nathan Lin" at 67.433,100.358 h3.05
Mechanical 1:
  lines w0.254: 65.315,103.236 65.315,102.336 65.315,101.641 65.315,59.26 ccw(c67.968,59.26) 66.092,57.384 ccw(c68.26,59.552) 68.26,56.486 122.528,56.486 ccw(c122.528,58.626) 124.042,57.113 ccw(c122.779,58.376) 124.565,58.376 124.565,103.008 ccw(c122.52,103.008) 123.788,104.613 ccw(c121.62,102.445) 121.62,105.511 116.74,105.511 ; 65.315,103.348 cw(c67.278,103.348) 65.89,104.736 cw(c67.7,102.925) 67.7,105.486 71.129,105.486 ; 69.16,105.486 87.865,105.486 116.715,105.486